# Altium PCB PCB1.PcbDoc (part 1 of 2)
Units mil, origin at the board's own origin, x right, y up, seen from the top; angles counter-clockwise.
Board outline 866.14 x 866.14 mil, 4 copper layers (Top Layer, Int1 (GND), Int2 (PWR), Bottom Layer), stack 53.912 mil thick; 31 components, 65 nets, 217 pads, 195 vias.
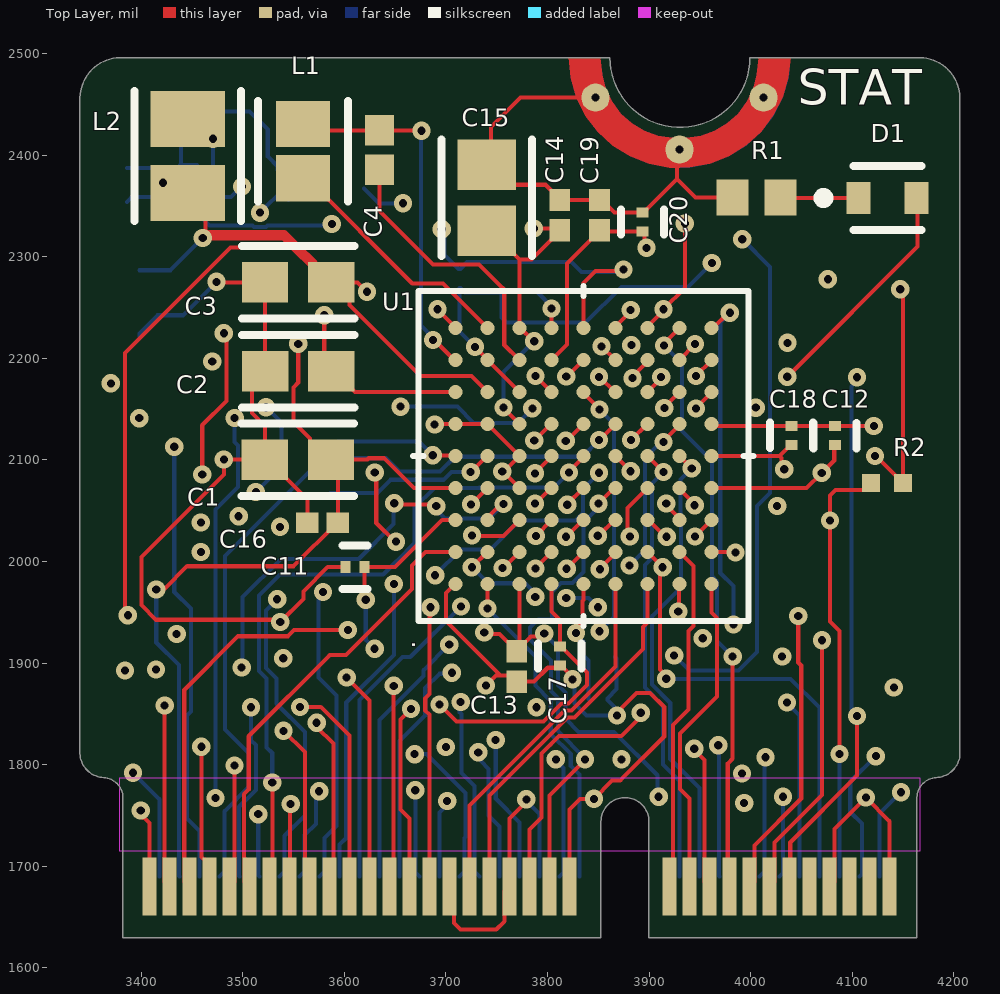
[diagram p0: Top Layer view]
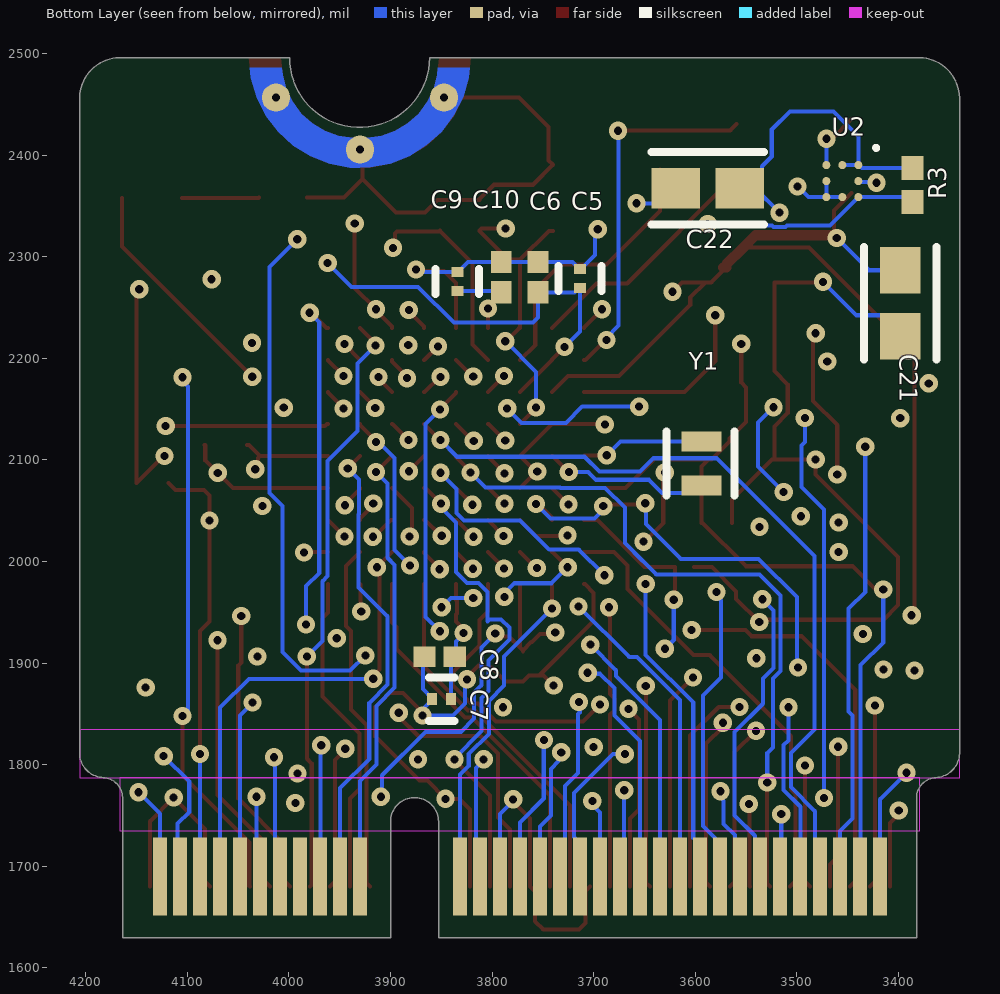
[diagram p1: Bottom Layer view, seen from below]
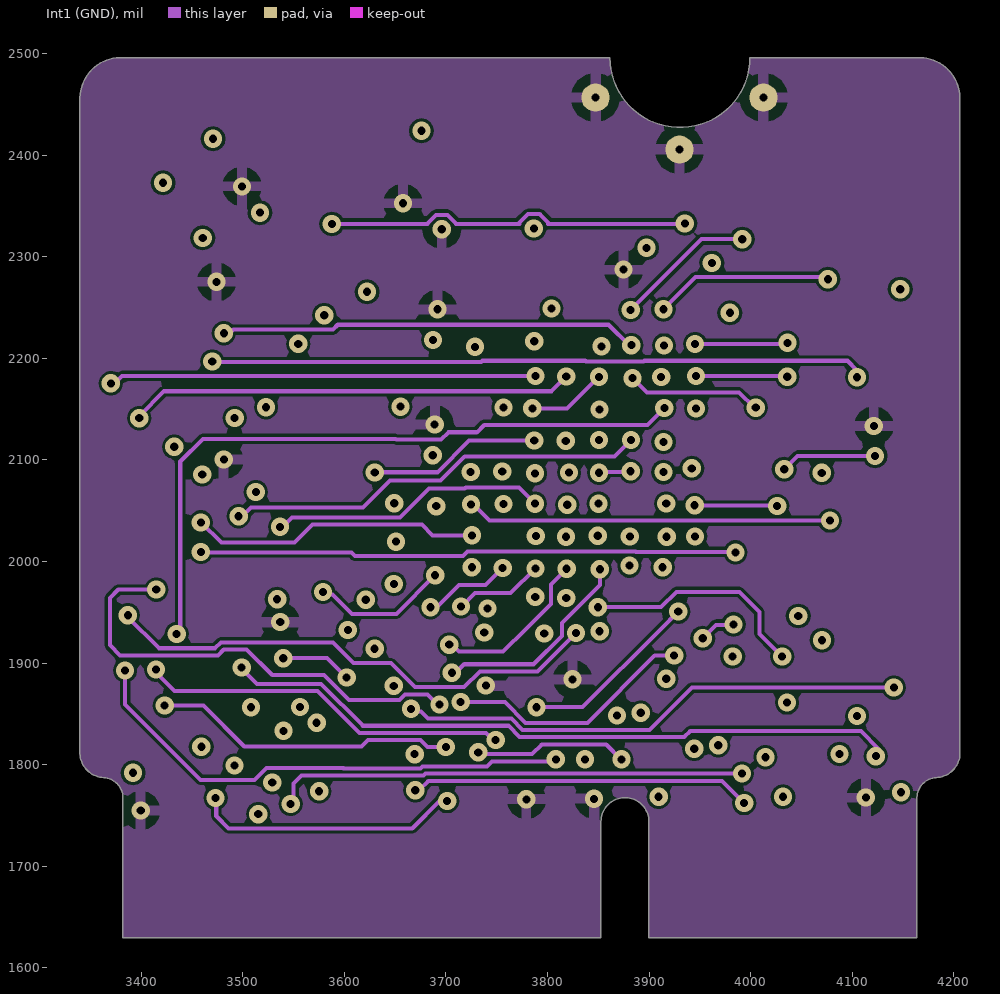
[diagram p2: Int1 (GND)]
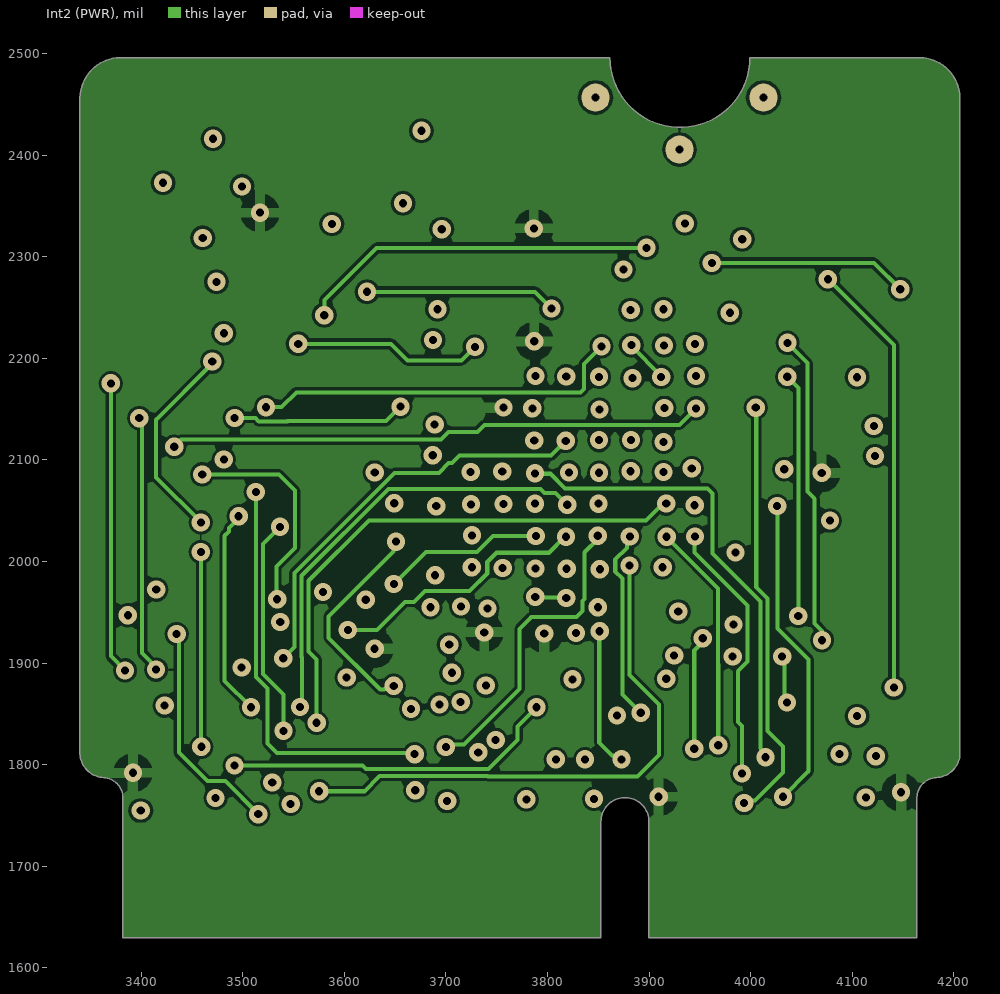
[diagram p3: Int2 (PWR)]
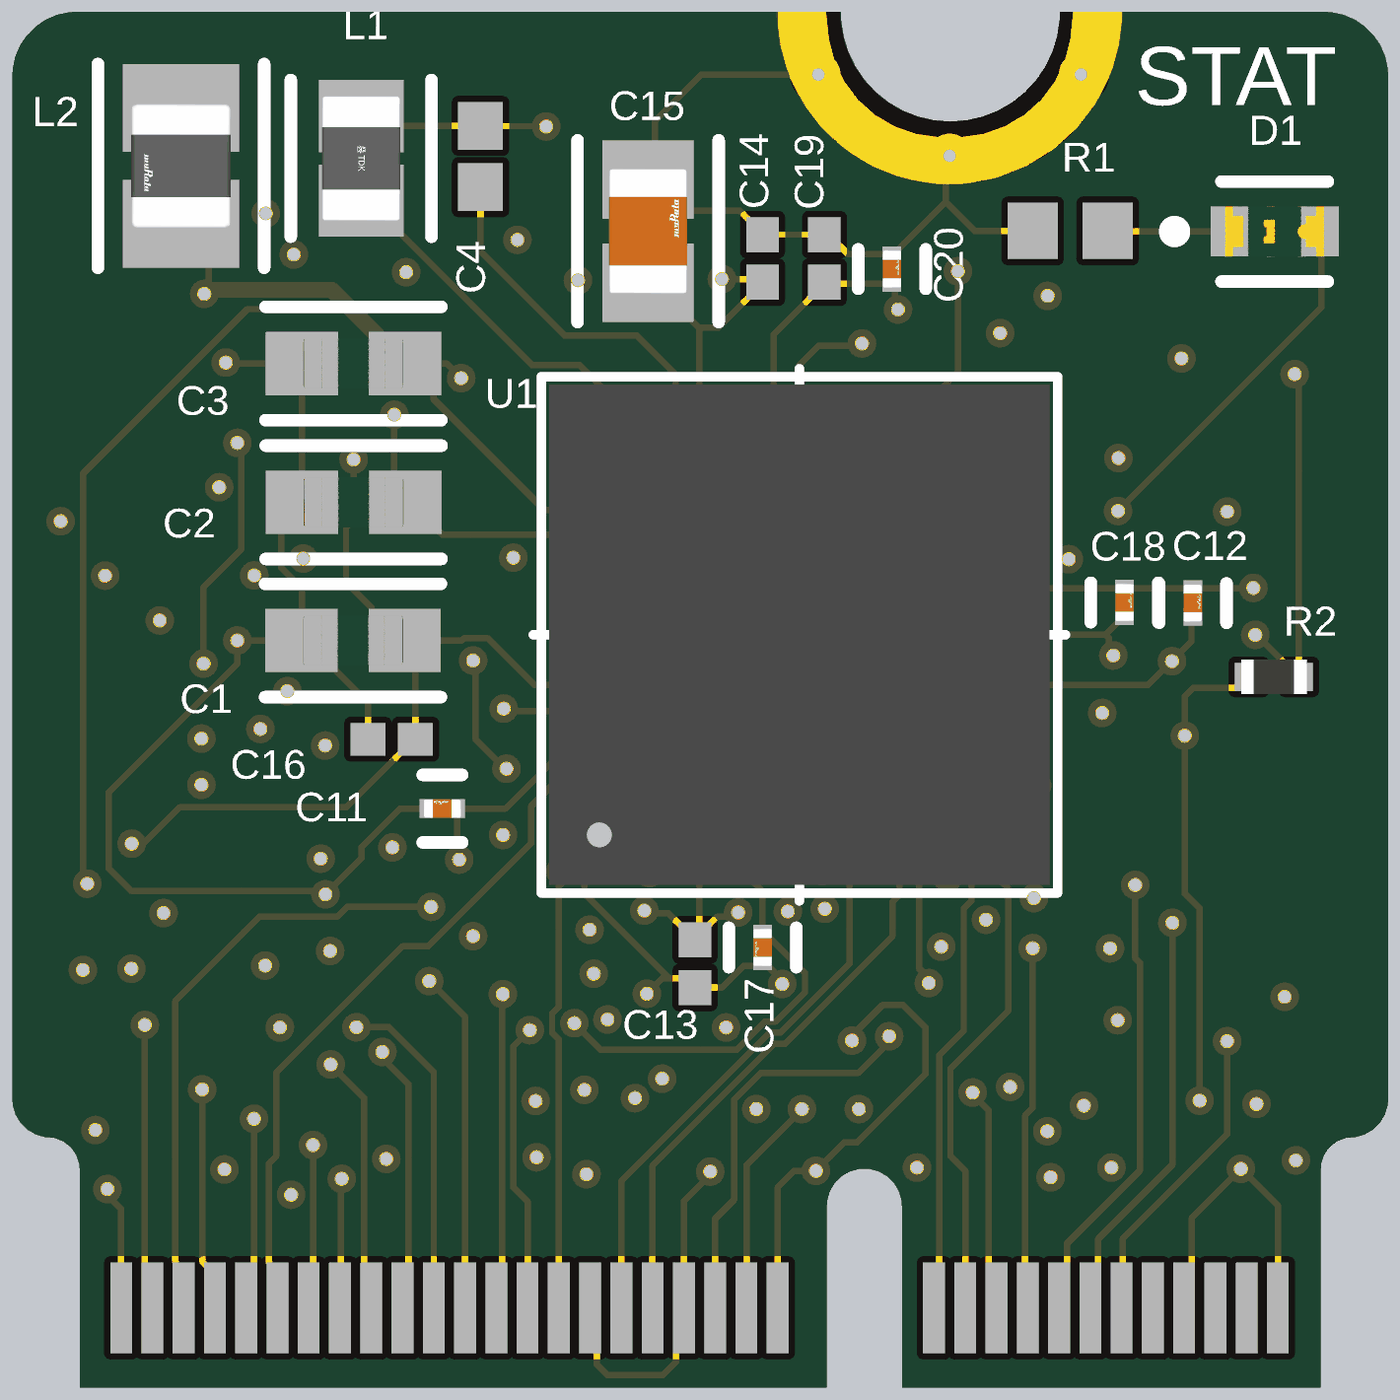
[diagram p5: 3D render of the assembled board from above, using the file's embedded part models]
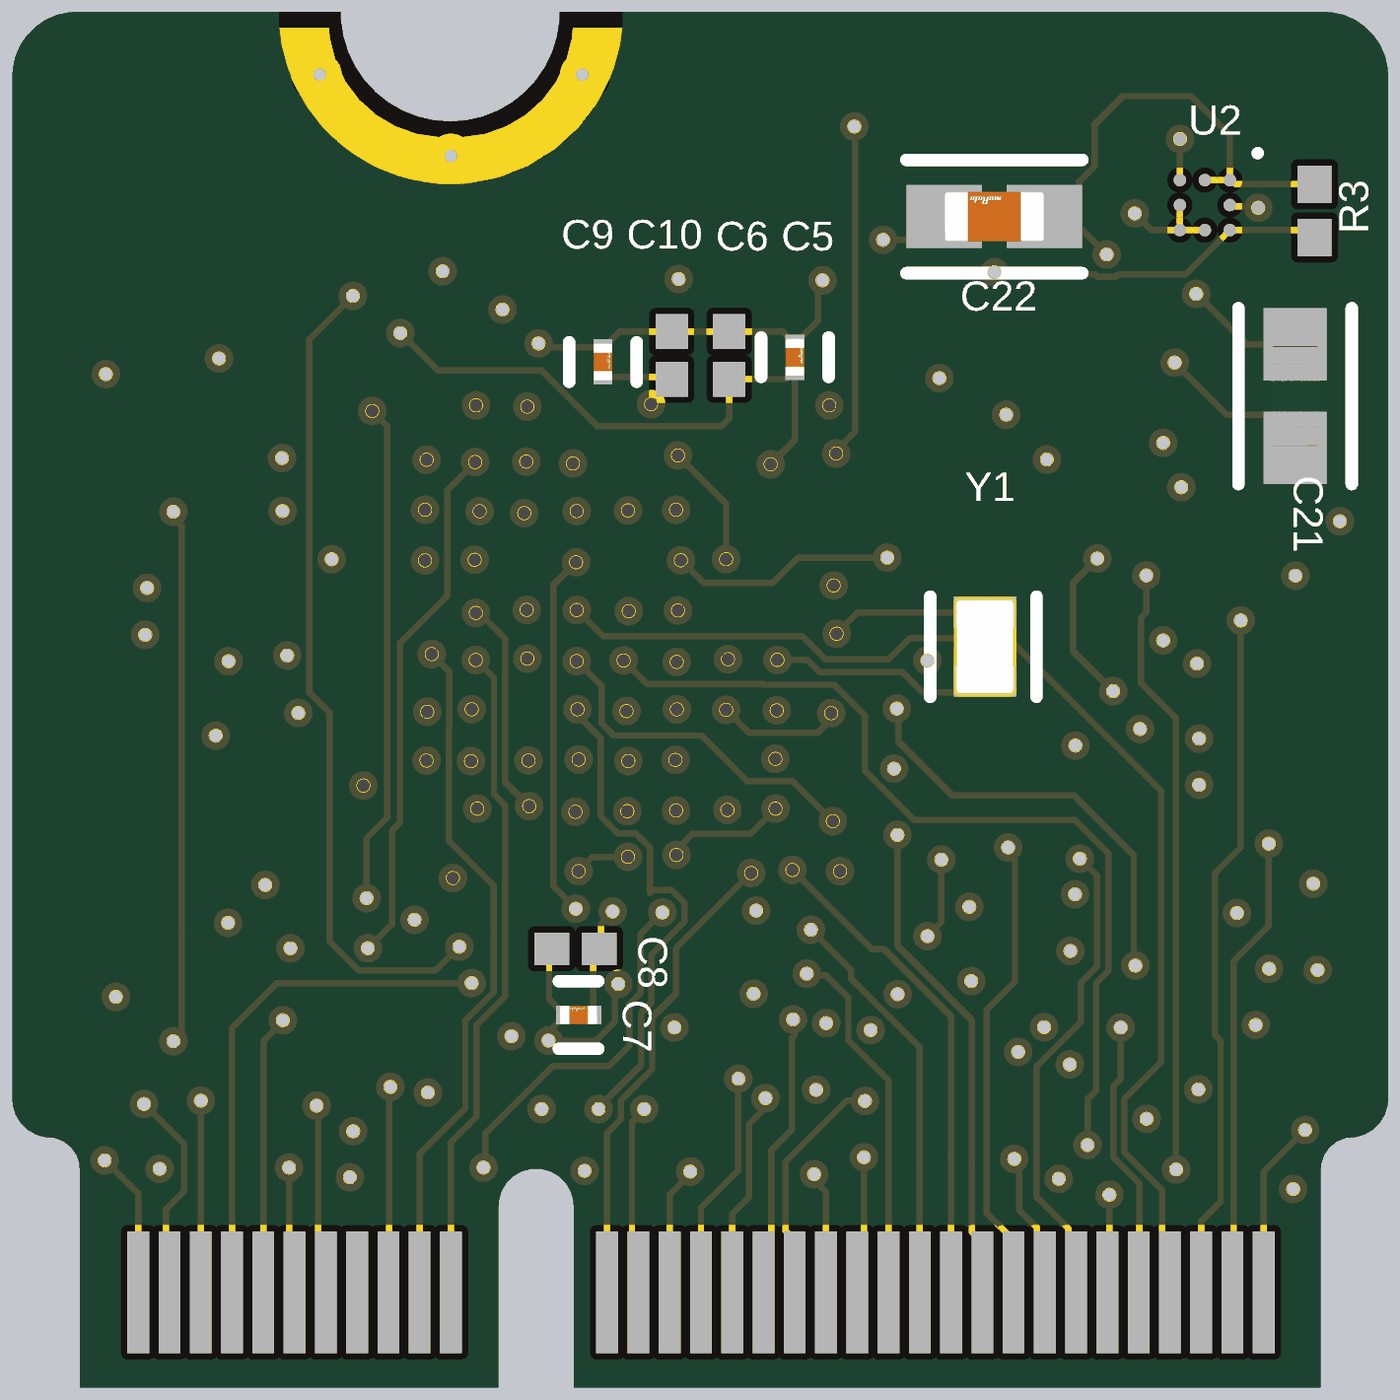
[diagram p6: 3D render of the assembled board from below, using the file's embedded part models]

## Layer stack, top to bottom
Top Solder: solder mask 1, SM-001, Dk 4
Top Layer: signal copper 1.378
Dielectric 1: prepreg 5.1, PP-017, Dk 4.3
Dielectric 2: prepreg 5.1, PP-017, Dk 4.3
Int1 (GND): signal copper 1.378
Dielectric 3: core 28, Core-039, Dk 4.8
Int2 (PWR): signal copper 1.378
Dielectric 4: prepreg 5.1, PP-017, Dk 4.3
Dielectric 5: prepreg 5.1, PP-017, Dk 4.3
Bottom Layer: signal copper 1.378
Bottom Solder: solder mask 1, SM-001, Dk 4

## Board outline
3382.23,1629.99 3852.71,1629.99 3852.71,1744.16 cw(c3876.33,1744.16) 3899.95,1744.16 3899.95,1629.99 4163.73,1629.99 4163.73,1767.79 cw(c4183.82,1767.42) 4182.43,1787.47 ccw(c4181.74,1811.77) 4206.05,1811.09 4206.05,2456.76 ccw(c4165.69,2455.78) 4166.68,2496.13 3999.36,2496.13 cw(c3930.46,2496.13) 3861.56,2496.13 3379.28,2496.13 ccw(c3380.26,2455.78) 3339.91,2456.76 3339.91,1811.09 ccw(c3364.21,1811.77) 3363.53,1787.47 cw(c3361.91,1767.21) 3382.23,1767.79

## Design rules (kind name [scope] priority, off if disabled: settings)
Clearance Clearance_BGA [WithinRoom('BGA')] p1: gap=4 ignorepadtopadclearanceinfootprint=FALSE
Clearance [All] p2: gap=3 ignorepadtopadclearanceinfootprint=FALSE
MinimumSolderMaskSliver [All] p1 off: minsoldermaskwidth=10
PolygonConnect [All] p1: connectstyle=Relief reliefconductorwidth=10 reliefentries=4 polygonreliefangle="90 Angle" airgapwidth=10
RoutingVias RoutingVias_BGA [WithinRoom('BGA')] p1: holewidth=8 width=18 viastyle="Through Hole" minholewidth=8 minwidth=18 maxholewidth=8 maxwidth=18
RoutingVias [All] p2: holewidth=8 width=18 viastyle="Through Hole" minholewidth=8 minwidth=18 maxholewidth=8 maxwidth=18
SilkToSilkClearance [All] p1 off: silktosilkclearance=10
SilkToSolderMaskClearance [IsPad] p1 off: minsilkscreentomaskgap=10 clearancetoexposedcopper=TRUE
SolderMaskExpansion [All] p1: expansion=4 istentingtop=FALSE
UnRoutedNet [All] p1: checkbadconnections=TRUE
Width Width_BGA [WithinRoom('BGA')] p1: maxlimit=4 minlimit=4 preferedwidth=4
Width [All] p2: maxlimit=10 minlimit=4 preferedwidth=4 midlayer1_maxwidth=4 midlayer2_maxwidth=4 bottomlayer_maxwidth=4 minimp=50.000000 maximp=50.000000 favimp=50.000000
26 further rules are at their usual default settings.

## Components (designator, comment, footprint, x,y, rotation, side; value= is the part's Value field where it differs from the comment)
C1 "C1608X5R0G226M080AA" FP-CL10-IPC_A 3554.33,2100.39 r180 top
C2 "C1608X5R0G226M080AA" FP-CL10-IPC_A 3554.72,2187.4 r180 top
C3 "C1608X5R0G226M080AA" FP-CL10-IPC_A 3554.61,2274.8 r180 top
C4 "GRM155R71H332KA01D" CAPC1005X55X25ML05T10 3634.65,2405.12 r90 top value="3300 pF"
C5 "GRM033R61C104KE14D" FP-GRM033-0_03-MFG 3713.39,2278.74 r90 bottom
C6 "C0402C105K8PAC7867" CAPC1005X60X30LL05T10 3754.72,2279.92 r270 bottom value=1uF
C7 "GRM033R61C104KE14D" FP-GRM033-0_03-MFG 3849.61,1864.57 r0 bottom
C8 "C0402C105K8PAC7867" CAPC1005X60X30LL05T10 3851.57,1906.3 r180 bottom value=1uF
C9 "GRM033R61C104KE14D" FP-GRM033-0_03-MFG 3834.25,2275.69 r90 bottom
C10 "C0402C105K8PAC7867" CAPC1005X60X30LL05T10 3790.94,2279.92 r270 bottom value=1uF
C11 "GRM033R61C104KE14D" FP-GRM033-0_03-MFG 3610.63,1994.49 r180 top
C12 "GRM033R61C104KE14D" FP-GRM033-0_03-MFG 4083.07,2123.92 r90 top
C13 "C0402C105K8PAC7867" CAPC1005X60X30LL05T10 3769.7,1896.82 r90 top value=1uF
C14 "C0402C105K8PAC7867" CAPC1005X60X30LL05T10 3812.2,2340.94 r270 top value=1uF
C15 "GRM21BR61A476ME15K" FP-GRM21B-0_2-e0_2_0_7-IPC_B 3740.16,2358.1 r90 top
C16 "C0402C105K8PAC7867" CAPC1005X60X30LL05T10 3578.74,2038.19 r0 top value=1uF
C17 "GRM033R61C104KE14D" FP-GRM033-0_03-MFG 3812.2,1907.09 r270 top
C18 "GRM033R61C104KE14D" FP-GRM033-0_03-MFG 4040.16,2124.31 r90 top
C19 "C0402C105K8PAC7867" CAPC1005X60X30LL05T10 3851.18,2340.94 r270 top value=1uF
C20 "GRM033R61C104KE14D" FP-GRM033-0_03-MFG 3893.7,2334.25 r90 top
C21 "C1608X5R0G226M080AA" FP-CL10-IPC_A 3398.43,2254.21 r270 bottom
C22 "GRM188R60J106ME47D" FP-GRM188-0_1-e0_2_0_55-IPC_A 3587.8,2367.32 r0 bottom
D1 "TLMO1000-GS08" FP-6_541-5056_01-4-MFG 4134.65,2357.87 r0 top
L1 "MLP2012H2R2MT0S1" FP-MLP2012M-IPC_C 3559.45,2403.94 r270 top
L2 "LQM2MPN2R2MG0L" FP-LQM2MPN_G0-IPC_A 3446.06,2399.21 r270 top
R1 "ERA3AEB301V" RESC1608X55X30LL20T20 4005.91,2358.27 r0 top
R2 "RMCF0402JT10K0" RESC1005X40X25LL05T05 4134.16,2077.42 r0 top
R3 "RC0402JR-070RL" RESC1005X40X25NL05T10 3386.22,2370.87 r270 bottom
U1 "MAX78000EXG+" 21-0735_MXM 3835.43,2103.94 r90 top
U2 "RP517Z121D-TR-F" WLCSP-8-P1 3460.24,2379.53 r0 bottom
Y1 "9HT12-32.768KDZY-T" FP-9HT12-MFG 3593.7,2096.46 r90 bottom

## Footprints (in the part's own frame and the unit in brackets; to place one, negate y for a bottom-side part, rotate by r counter-clockwise, add the part's x,y. Pads: shape width x height; smd on the part's side, far side on the other; paste and mask are expansions set on the pad)
21-0735_MXM [mil]
  round 14 smd paste+0 mask+0: A1(-125.98,125.98) A2(-94.49,125.98) A3(-62.99,125.98) A4(-31.5,125.98) A5(0,125.98) A6(31.5,125.98) A7(62.99,125.98) A8(94.49,125.98) A9(125.98,125.98) B1(-125.98,94.49) B2(-94.49,94.49) B3(-62.99,94.49) B4(-31.5,94.49) B5(0,94.49) B6(31.5,94.49) B7(62.99,94.49) B8(94.49,94.49) B9(125.98,94.49) C1(-125.98,62.99) C2(-94.49,62.99) C3(-62.99,62.99) C4(-31.5,62.99) C5(0,62.99) C6(31.5,62.99) C7(62.99,62.99) C8(94.49,62.99) C9(125.98,62.99) D1(-125.98,31.5) D2(-94.49,31.5) D3(-62.99,31.5) D4(-31.5,31.5) D5(0,31.5) D6(31.5,31.5) D7(62.99,31.5) D8(94.49,31.5) D9(125.98,31.5) E1(-125.98,0) E2(-94.49,0) E3(-62.99,0) E4(-31.5,0) E5(0,0) E6(31.5,0) E7(62.99,0) E8(94.49,0) E9(125.98,0) F1(-125.98,-31.5) F2(-94.49,-31.5) F3(-62.99,-31.5) F4(-31.5,-31.5) F5(0,-31.5) F6(31.5,-31.5) F7(62.99,-31.5) F8(94.49,-31.5) F9(125.98,-31.5) G1(-125.98,-62.99) G2(-94.49,-62.99) G3(-62.99,-62.99) G4(-31.5,-62.99) G5(0,-62.99) G6(31.5,-62.99) G7(62.99,-62.99) G8(94.49,-62.99) G9(125.98,-62.99) H1(-125.98,-94.49) H2(-94.49,-94.49) H3(-62.99,-94.49) H4(-31.5,-94.49) H5(0,-94.49) H6(31.5,-94.49) H7(62.99,-94.49) H8(94.49,-94.49) H9(125.98,-94.49) J1(-125.98,-125.98) J2(-94.49,-125.98) J3(-62.99,-125.98) J4(-31.5,-125.98) J5(0,-125.98) J6(31.5,-125.98) J7(62.99,-125.98) J8(94.49,-125.98) J9(125.98,-125.98)
  silkscreen extent -168,-168 168,168, body extent -157,-157 157,157, height 51
CAPC1005X55X25ML05T10 [mm] "Chip Capacitor, 2-Leads, Body 1.00x0.50mm, IPC Low Density"
  rect 0.76x0.72 smd: 1(-0.49,0) 2(0.49,0)
  body extent -0.53,-0.28 0.53,0.27, height 0.55
CAPC1005X60X30LL05T10 [mm] "Chip Capacitor, 2-Leads, Body 1.00x0.50mm, IPC High Density"
  rect 0.56x0.52 smd: 1(-0.38,0) 2(0.38,0)
  body extent -0.53,-0.28 0.53,0.28, height 0.6
FP-6_541-5056_01-4-MFG [mm]
  rect 0.6x0.8 smd paste+0 mask+0: 1(-0.725,0) 2(0.725,0)
  silkscreen extent -1.72,-0.8 0.85,0.8, body extent -1.12,-0.55 1.12,0.55, height 0.25
FP-9HT12-MFG [mm]
  rect 0.5x1 smd paste+0 mask+0: 1(-0.55,0) 2(0.55,0)
  silkscreen extent -0.8,-0.82 0.8,0.87, body extent -0.8,-0.5 0.8,0.5, height 0.5
FP-CL10-IPC_A [mil]
  rect 45.6x39.85 smd paste+0 mask+0: 1(-32.56,0) 2(32.56,0)
  silkscreen extent -55,-36 55,36, body extent -75,-40 75,40, height 10
FP-GRM21B-0_2-e0_2_0_7-IPC_B [mil]
  rect 49.4x57.33 smd paste+0 mask+0: 1(-32.51,0) 2(32.51,0)
  silkscreen extent -57,-44 57,44, body extent -67,-39 67,39, height 10
FP-GRM033-0_03-MFG [mm]
  rect 0.25x0.3 smd paste+0 mask+0: 1(-0.238,0) 2(0.238,0)
  silkscreen extent -0.32,-0.54 0.32,0.54, body extent -0.3,-0.15 0.3,0.15, height 0.33
FP-GRM188-0_1-e0_2_0_55-IPC_A [mil]
  rect 47.57x39.85 smd paste+0 mask+0: 1(-31.57,0) 2(31.57,0)
  silkscreen extent -55,-36 55,36, body extent -31,-16 31,16, height 36
FP-LQM2MPN_G0-IPC_A [mil]
  rect 55.36x73.16 smd paste+0 mask+0: 1(-36.46,0) 2(36.46,0)
  silkscreen extent -64,-52 64,52, body extent -84,-56 84,56, height 10
FP-MLP2012M-IPC_C [mil]
  rect 45.45x53.39 smd paste+0 mask+0: 1(-26.61,0) 2(26.61,0)
  silkscreen extent -49,-44 49,44, body extent -53,-32 53,32, height 10
RESC1005X40X25LL05T05 [mm] "Chip Resistor, 2-Leads, Body 1.05x0.55mm, IPC High Density"
  rect 0.45x0.45 smd: 1(-0.4,0) 2(0.4,0)
  body extent -0.53,-0.28 0.53,0.28, height 0.4
RESC1005X40X25NL05T10 [mm] "Chip Resistor, 2-Leads, Body 1.00x0.50mm, IPC Medium Density"
  rect 0.6x0.55 smd: 1(-0.425,0) 2(0.425,0)
  body extent -0.53,-0.27 0.53,0.28, height 0.4
RESC1608X55X30LL20T20 [mm] "Chip Resistor, 2-Leads, Body 1.60x0.80mm, IPC High Density"
  rect 0.8x0.9 smd: 1(-0.6,0) 2(0.6,0)
  body extent -0.9,-0.5 0.9,0.5, height 0.55
WLCSP-8-P1 [mm] "BGA, 9-Leads, Body 1.45x1.48mmx0.40mm, Pitch 0.40mm"
  round 0.2 smd: A1(-0.527,-0.273) A2(-0.527,0.127) A3(-0.527,0.527) B1(-0.127,-0.273) B3(-0.127,0.527) C1(0.273,-0.273) C2(0.273,0.127) C3(0.273,0.527)
  silkscreen extent -1.02,-0.75 -0.92,-0.65, body extent -0.87,-0.6 0.61,0.85, height 0.4

## Part data
C1 C2 C3 C21: library part CMP-13271-002755-1, "Cap Ceramic 22uF 16V X5R ±20% Pad SMD 0603 +85°C T/R", Capacitance=22uF, Case Code (Imperial)=0603, Case Code (Metric)=1608, Max Operating Temperature=85°C, Min Operating Temperature=-55°C, Tolerance=20%, Voltage Rating=16V, Case/Package=0603, Mount="Surface Mount", Packaging="Tape and Reel"
C4: library part CMP-2008-04658-1, Manufacturer=Murata, Part Number=GRM155R71H332KA01D
C5 C7 C9 C11 C12 C17 C18 C20: library part CMP-06035-039275-1, "Chip Multilayer Ceramic Capacitors for General Purpose, 0201, 0.10uF, X5R, 15%, 10%, 16V", Capacitance=100nF, Dielectric=X5R, Tolerance=10%, Voltage Rating (DC)=16V, Length=600um, Thickness=300um, Width=300um
C6 C8 C10 C13 C14 C16 C19: library part CMP-2008-02081-1, Manufacturer=Kemet, Part Number=C0402C105K8PAC7867
C15: library part CMP-06035-042633-1, "Chip Multilayer Ceramic Capacitors for General Purpose, 0805, 47uF, X5R, 15%, 20%, 10V", Capacitance=47uF, Case Code (Imperial)=0805, Case Code (Metric)=2012, Dielectric=X5R, Max Operating Temperature=85°C, Min Operating Temperature=-55°C, Package Quantity=10000, Tolerance=20%, Voltage Rating=10V, Case/Package=0805, Length=0.079inch, Mount="Surface Mount", Packaging="Tape and Reel", Termination=SMD/SMT, Thickness=0.057inch, Voltage Rating (DC)=10V, Weight=0.000335oz, Width=0.049inch
C22: library part CMP-2006-02792-2, "Chip Multilayer Ceramic Capacitors for General Purpose, 0603, 10uF, X5R, 15%, 20%, 6.3V", Capacitance=10uF, Case Code (Imperial)=0603, Case Code (Metric)=1608, Dielectric=X5R, Max Operating Temperature=85°C, Min Operating Temperature=-55°C, Package Quantity=4000, Tolerance=20%, Voltage=6.3V, Case/Package=0603, Depth=0.8mm, Height=0.8mm, Lead Free="Lead Free", Length=1.6mm, Material=Ceramic, Mount="Surface Mount", Packaging="Tape and Reel", Radiation Hardening=No, REACH SVHC="No SVHC", Termination=SMD/SMT, Thickness=0.035inch, Voltage Rating=6.3V, Voltage Rating (DC)=6.3V, Width=0.031inch
D1: library part CMP-02520-000010-1, "LED ORANGE 0603 SMD", Ambient Temperature Range High=+100°C, Ambient Temperature Range Low=-40°C, Colour=Orange, Forward Current=2mA, Forward Voltage=1.8V, Manufacturer=Vishay, Max Junction Temp=+120°C, Package=6.541-5056.01-4, Power Dissipation=40mW, Reverse Voltage=6V, Temperature="-40°C to +100°C", Automotive=Yes, Automotive Grade="Grade 2", Category=Diode, ComponentLink2Description=Datasheet, ComponentLink2URL=http://www.vishay.com/docs/83172/tlmo1000.pdf, Device Class L1=Optoelectronics, Device Class L2=LEDs, Device Class L3=unset, Digikey Description="LED ORANGE 0603 SMD", Height=0.65mm, Lead Free=Yes, Led Orientation="Top View", Luminous Intensity=7.5mcd, Manufacturer Part Number=TLMO1000-GS08, Octopart=https://octopart.com/tlmo1000-gs08-vishay-41955669, Peak Emmision Wavelength=610nm, RoHS=TRUE, Temperature Range High=+100°C, Temperature Range Low=-40°C, Viewing Angle=160°, Wavelength=605nm
L1: library part CMP-08253-000154-1, "Shielded Multilayer Inductor 2.2uH ±20% 1000mA 195mΩ SMD 0805", Case Code (Imperial)=0805, Case Code (Metric)=2012, Current Rating=1A, DC Resistance (DCR)=195mR, Inductance=2.2uH, Max Operating Temperature=125°C, Min Operating Temperature=-40°C, Package Quantity=4000, Test Frequency=2MHz, Tolerance=20%, Case/Package=0805, Core Material=Ferrite, Height - Seated (Max)=0.039inch, Lead Free="Lead Free", Length=0.079inch, Mount="Surface Mount", Packaging="Tape and Reel", RoHS Compliant=Yes, Shielding=Shielded, Width=0.049inch
L2: library part CMP-06042-008995-1, "Multilayer Type Inductor for Power Lines, 0806 (2016), 2.2μH, 20%, 0.138Ω, 1.2A", Case Code (Imperial)=0805, Case Code (Metric)=2012, Current Rating=1.2A, DC Resistance (DCR)=138mR, Inductance=2.2uH, Max Operating Temperature=125°C, Min Operating Temperature=-55°C, Package Quantity=3000, Self Resonant Frequency=40MHz, Test Frequency=1MHz, Tolerance=20%, Case/Package=0805, Core Material=Ferrite, Height=0.9mm, Height - Seated (Max)=0.039inch, Length=0.079inch, Max DC Current=1.2A, Mount="Surface Mount", Packaging="Tape and Reel", Shielding=Shielded, Termination=SMD/SMT, Weight=0.000353oz, Width=0.049inch
R1: library part CMP-2000-00025-1, Manufacturer=Panasonic, Part Number=ERA3AEB301V
R2: library part CMP-2000-07588-1, "Chip Resistor, 10 KOhm, +/- 1%, 0.1 W, -55 to 155 degC, 0402 (1005 Metric), RoHS, Tape and Reel", Case Code (Imperial)=0402, Case Code (Metric)=1005, Manufacturer=Panasonic, Max Operating Temperature=155degC, Max Power Dissipation=100mW, Min Operating Temperature=-55degC, Package Description="2-Pin Surface Mount Device, Body 1 x 0.5 mm", Package Quantity=1, Package Reference=402, Resistance=10KOhm, Temperature Coefficient=100ppm\/degreesC, Tolerance=1%, Voltage Rating=50V, Case\/Package=0402, Composition=ThickFilm, Contact Plating=Tin, Datasheet URL=https://industrial.panasonic.com/cdbs/www-data/pdf/RDA0000/AOA0000C304.pdf, Datasheet Version=02/2017, Depth=0.5mm, Height=0.35mm, Lead Free=LeadFree, Length=1mm, Manufacturer URL=http://www.panasonic.com/, Military Standard=Not, Mount=SurfaceMount, Mounting Technology=SurfaceMount, Number of Pins=2, Number of Terminations=2, Packaging=TapeandReel, Power Rating=100mW, Radiation Hardening=No, REACH SVHC=NoSVHC, RoHSCompliant=True, Termination=SMD/SMT, Voltage Rating (DC)=50V, Width=0.02inch
R3: library part CMP-1011-00001-2, Manufacturer="Yageo / Phycomp", Part Number=RC0402JR-070RL
U1: "No Description Available", Built_By=EMA_April, Copyright="Copyright (C) 2018 Accelerated Designs. All rights reserved", Manufacturer_Part_Number=MAX78000EXG+, RefDes=RefDes, SourceLibrary=Add_to_database_2021-03-26, Type=DEV, Vendor="Maxim Integrated Products"
U2: library part Component_1
Y1: library part CMP-18717-000010-1, "CRYSTAL 32.7680KHZ 7PF SMD", Case/Package=SMD/SMT, ESR (Equivalent Series Resistance)=90kR, Frequency=32.768kHz, Frequency Tolerance=20ppm, Load Capacitance=7pF, Max Operating Temperature=85°C, Min Operating Temperature=-40°C, Height=0.02inch, Lead Free="Lead Free", Length=0.063inch, Mount="Surface Mount", Packaging="Tape and Reel", Width=0.039inch

## Free pads (board coordinates)
  rect 13.78x57.09 smd paste+0: 1(4136.69,1680.16) 3(4117.01,1680.16) 5(4097.32,1680.16) 7(4077.64,1680.16) 9(4057.95,1680.16) 11(4038.27,1680.16) 13(4018.58,1680.16) 15(3998.9,1680.16) 17(3979.21,1680.16) 19(3959.53,1680.16) 21(3939.84,1680.16) 23(3920.16,1680.16) 33(3821.73,1680.16) 35(3802.05,1680.16) 37(3782.36,1680.16) 39(3762.68,1680.16) 41(3742.99,1680.16) 43(3723.31,1680.16) 45(3703.62,1680.16) 47(3683.94,1680.16) 49(3664.25,1680.16) 51(3644.57,1680.16) 53(3624.88,1680.16) 55(3605.2,1680.16) 57(3585.51,1680.16) 59(3565.83,1680.16) 61(3546.14,1680.16) 63(3526.46,1680.16) 65(3506.77,1680.16) 67(3487.09,1680.16) 69(3467.4,1680.16) 71(3447.72,1680.16) 73(3428.03,1680.16) 75(3408.35,1680.16)
  rect 13.78x76.77 smd far side paste+0: 2(4126.85,1690) 4(4107.17,1690) 6(4087.48,1690) 8(4067.8,1690) 10(4048.11,1690) 12(4028.43,1690) 14(4008.74,1690) 16(3989.06,1690) 18(3969.37,1690) 20(3949.69,1690) 22(3930,1690) 32(3831.58,1690) 34(3811.89,1690) 36(3792.21,1690) 38(3772.52,1690) 40(3752.83,1690) 42(3733.15,1690) 44(3713.46,1690) 46(3693.78,1690) 48(3674.09,1690) 50(3654.41,1690) 52(3634.72,1690) 54(3615.04,1690) 56(3595.35,1690) 58(3575.67,1690) 60(3555.98,1690) 62(3536.3,1690) 64(3516.61,1690) 66(3496.93,1690) 68(3477.24,1690) 70(3457.56,1690) 72(3437.87,1690) 74(3418.19,1690)
  round 27.87 hole 7.87: GND1(3847.32,2456.73) GND2(3930,2405.55) GND3(4012.68,2456.73)

## Via types
v1: diameter 18, hole 8, Top Layer to Bottom Layer, tented both sides, 195 vias

## Nets (pads, with @x,y where several pads share a name; then routed paths per layer and width w, separated by ;. In a path a pad name is that pad's centre, name@x,y a point inside that pad or via, vN(x,y) a via of type N, cw(c..) or ccw(c..) an arc to the next point about the centre after c; other vN are vias at no path point)
3V3: C11.1 C12.1 C13.2 C14.2 C15.1 C22.1 pad.2 pad.74 R3.1 U1.A3 U1.C1 U1.C6 U1.C9 U1.J4 U2.A1 U2.B1 | length 1555.7
  Top Layer w4: v1(3621.19,1962.43) 3619.98,1963.63 C11.1@3619.98,1994.49 3650.13,1994.49 3696.45,2040.81 3709.31,2040.81 U1.A3@3709.45,2040.94 ; v1(3737.8,1930.32) 3739.43,1928.68 3752.8,1928.68 3760.67,1920.8 3761.46,1920.8 C13.2@3769.7,1912.57 ; C15.1@3740.16,2325.59 3744.13,2325.59 3772.44,2297.27 ; v1(3756.69,2151.57) 3756.69,2151.38 3772.44,2135.63 U1.C6@3772.44,2135.43 ; C13.2@3769.7,1911.78 C13.2@3769.7,1912.57 ; U1.C1@3772.44,1977.95 C13.2@3772.44,1915.31 ; v1(3786.61,2327.95) 3810.24,2327.95 C14.2@3812.2,2325.98 3812.2,2325.2 3784.28,2297.27 3772.44,2297.27 ; v1(3787.01,2216.93) 3786.22,2216.93 3773.23,2229.92 U1.C9@3772.44,2229.92 3772.44,2297.27 ; v1(3796.85,1929.13) 3794.17,1926.46 3783.58,1926.46 C13.2@3772.44,1915.31 ; U1.J4@3961.42,2072.44 4055.12,2072.44 v1(4070,2087.33) 4082.28,2099.61 4082.28,2114.49 4082.36,2114.57 C12.1@4083.07,2114.57 ; C13.2@3769.7,1912.57 C13.2@3772.44,1915.31
  Bottom Layer w4: R3.1@3386.22,2387.6 3435.76,2387.6 3439.49,2391.32 3439.49,2418.62 3463.99,2443.12 3506.81,2443.12 3524.73,2425.2 3524.73,2398.82 3534.44,2389.11 3534.44,2385.25 C22.1@3552.36,2367.32 ; v1(3392.13,1792.13) 3418.19,1766.06 pad.74@3418.19,1690 ; U2.A1@3439.49,2390.28 U2.B1@3455.24,2390.28 ; v1(3517.05,2343.42) 3540.96,2367.32 C22.1@3552.36,2367.32 ; C22.1@3544.88,2355.98 C22.1@3556.23,2367.32 C22.1@3552.36,2367.32 ; v1(3621.19,1962.43) 3621.19,1922.91 v1(3629.92,1914.17) ; v1(3756.69,2151.57) 3756.69,2186.61 v1(3787.01,2216.93) ; v1(3796.85,1929.13) 3810.59,1915.39 3810.59,1878.31 3817.59,1871.31 3817.59,1845.4 3830.58,1832.41 3865.56,1832.41 3908.27,1789.7 3908.27,1769.68 v1(3909.45,1768.5) ; pad.2@4126.85,1690 4126.85,1751.83 v1(4148.04,1773.02)
AIN0: pad.34 U1.D7 | length 1348.5
  Top Layer w4: v1(3788.19,2182.68) U1.D7@3803.94,2166.93
  Int1 (GND) w4: v1(3370.25,2175.45) 3374.04,2175.45 3381.27,2182.68 v1(3788.19,2182.68) ; v1(3384.25,1892.91) 3384.25,1859.45 3458.49,1785.21 3511.87,1785.21 3523.34,1796.68 3599.1,1796.68 3599.33,1796.45 3675.09,1796.45 3676.89,1798.25 3738.5,1798.25 3738.59,1798.34 3740.41,1798.34 3745.52,1803.45 3806.39,1803.45 v1(3808.28,1805.34)
  Int2 (PWR) w4: v1(3370.25,2175.45) 3370.25,1906.91 v1(3384.25,1892.91)
  Bottom Layer w4: v1(3808.28,1805.34) 3808.28,1804.61 3815.97,1796.93 3815.97,1694.08 pad.34@3811.89,1690
AIN1: pad.38 U1.E8 | length 1225.4
  Top Layer w4: v1(3818.5,2182.28) 3819.29,2182.28 U1.E8@3835.43,2198.43
  Int1 (GND) w4: v1(3398.25,2141.22) 3398.25,2143.53 3422.4,2167.68 3803.9,2167.68 v1(3818.5,2182.28) ; v1(3414.79,1893.7) 3414.79,1890.72 3432.81,1872.7 3573.76,1872.7 3615.01,1831.45 3739.32,1831.45 3746.32,1824.45 v1(3748.98,1824.45)
  Int2 (PWR) w4: v1(3398.25,2141.22) 3400.93,2138.54 3400.93,2131.95 3401.01,2131.88 3401.01,1909.82 3414.79,1896.04 v1(3414.79,1893.7)
  Bottom Layer w4: v1(3748.98,1824.45) 3749.13,1824.3 3749.13,1766.78 3772.52,1743.38 pad.38@3772.52,1690
AIN2: pad.40 U1.E7 | length 675
  Top Layer w4: U1.E7@3835.43,2166.93 3835.43,2166.16 3851.18,2150.41 v1(3851.18,2149.65)
  Int1 (GND) w4: v1(3731.89,1812.25) 3733.69,1810.45 3784.79,1810.45 3794.42,1820.08 3857.87,1820.08 3872.61,1805.34 v1(3872.83,1805.34)
  Int2 (PWR) w4: v1(3851.38,1931.46) 3850.96,1931.04 3850.96,1821.94 3863.7,1809.2 3865.19,1809.2 3869.05,1805.34 v1(3872.83,1805.34)
  Bottom Layer w4: v1(3731.89,1812.25) 3734.57,1809.57 3734.57,1803.6 3742.13,1796.04 3742.13,1750 3752.83,1739.3 pad.40@3752.83,1690 ; v1(3851.18,2149.65) 3865.57,2135.25 3865.57,1945.66 v1(3851.38,1931.46)
AIN3: pad.42 U1.F9 | length 1108
  Top Layer w4: U1.F9@3866.93,2229.92 3866.93,2231.3 3881.89,2246.26 v1(3881.89,2247.64)
  Int1 (GND) w4: v1(3714.57,1861.77) 3758.03,1861.77 3778.47,1841.33 3839.36,1841.33 3905.59,1907.56 v1(3924.7,1907.56) ; v1(3881.89,2247.64) 3951.57,2317.32 v1(3991.73,2317.32)
  Bottom Layer w4: v1(3714.57,1861.77) 3712.8,1860 3713.7,1859.09 3713.7,1851.65 3715.35,1850 3715.35,1792.13 3728.26,1779.22 3728.26,1694.89 pad.42@3733.15,1690 ; v1(3924.7,1907.56) 3939.65,1892.64 3988.11,1892.64 4006.3,1910.83 4006.3,2054.75 4019.07,2067.52 4019.07,2289.98 v1(3991.73,2317.32)
AIN4: pad.44 U1.F8 | length 1041.2
  Top Layer w4: v1(3853.15,2211.85) 3853.33,2211.85 3866.75,2198.43 U1.F8@3866.93,2198.43
  Int2 (PWR) w4: v1(3512.99,2068.47) 3512.99,1886.56 3524.41,1875.14 3524.41,1820.87 3533.86,1811.42 3668.32,1811.42 v1(3669.29,1810.45) ; v1(3523.01,2151.97) 3538.19,2151.97 3552.8,2166.57 3832.32,2166.57 3835.79,2170.04 3835.79,2194.45 v1@3853.15,2211.81
  Bottom Layer w4: v1(3512.99,2068.47) 3538.19,2093.67 3538.19,2136.79 v1(3523.01,2151.97) ; v1(3669.29,1810.45) 3669.63,1810.78 3680.95,1810.78 3719.29,1772.44 3719.29,1728.73 3718.35,1727.79 3718.35,1694.89 pad.44@3713.46,1690
AIN5: pad.46 U1.F7 | length 1137.3
  Top Layer w4: v1(3850.79,2181.85) 3851.4,2181.85 3866.32,2166.93 U1.F7@3866.93,2166.93
  Int1 (GND) w4: v1(3473.35,1767.32) 3474.02,1766.66 3474.02,1749.61 3486.22,1737.4 3666.93,1737.4 3693.85,1764.32 v1(3701.31,1764.32) ; v1(3785.17,2150.86) 3819.36,2150.86 3850.35,2181.85 v1(3850.79,2181.85)
  Int2 (PWR) w4: v1(3492.13,2141.34) 3512.47,2141.34 3515.84,2137.97 3543.99,2137.97 3544.21,2138.19 3640.95,2138.19 v1(3655.28,2152.52)
  Bottom Layer w4: v1(3473.35,1767.32) 3473.35,2051.45 3495.5,2073.59 3495.5,2114.39 3492.13,2117.76 v1(3492.13,2141.34) ; v1(3655.28,2152.52) 3711.26,2152.52 3727.2,2136.57 3770.88,2136.57 v1(3785.17,2150.86) ; pad.46@3693.78,1690 3693.78,1753 3701.31,1760.53 v1(3701.31,1764.32)
AIN6: pad.48 U1.G8 | length 1001.4
  Top Layer w4: v1(3883.79,2180.57) 3883.79,2182.18 3898.43,2196.81 U1.G8@3898.43,2198.43
  Int1 (GND) w4: v1(3669.94,1774.98) 3673.42,1774.98 3682.69,1784.25 3971.72,1784.25 v1(3993.6,1762.37) ; v1(3883.79,2180.57) 3897.82,2166.54 3988.58,2166.54 4003.58,2151.54 v1(4005.07,2151.54)
  Int2 (PWR) w4: v1(3993.6,1762.37) 3996.14,1764.91 4004.28,1764.91 4031.89,1792.52 4031.89,1818.11 4016.57,1833.43 4016.57,1963.8 4005.49,1974.88 4005.49,2151.12 v1(4005.07,2151.54)
  Bottom Layer w4: v1(3669.94,1774.98) 3669.94,1694.15 pad.48@3674.09,1690
AIN7: pad.49 R3.2 U1.G9 U2.A3 | length 1989.1
  Top Layer w4: pad.49@3664.25,1680.16 3664.25,1747.17 3655.29,1756.13 3655.29,1844.66 v1(3665.7,1855.07) ; U1.G9@3898.43,2229.92 3898.43,2231.3 3914.17,2247.05 v1(3914.17,2248.43) 3935.21,2269.46 v1(3935.21,2332.84)
  Int1 (GND) w4: v1(3587.8,2332.28) 3681.99,2332.28 3681.99,2332.96 3690.19,2341.17 3701.79,2341.17 3709.99,2332.96 3709.99,2332.28 3772.61,2332.28 3772.61,2333.75 3780.82,2341.95 3792.41,2341.95 3800.61,2333.75 3800.61,2332.28 3934.65,2332.28 v1(3935.21,2332.84) ; v1(3665.7,1855.07) 3668.38,1852.39 3675.56,1852.39 3682.5,1845.45 3764.45,1845.45 3775.57,1834.33 3900.48,1834.33 3942.13,1875.98 v1(4140.94,1875.98) ; v1(3914.17,2248.43) 3945.67,2279.92 4074.02,2279.92 v1(4075.98,2277.95)
  Int2 (PWR) w4: v1(4075.98,2277.95) 4140.94,2212.99 v1(4140.94,1875.98)
  Bottom Layer w4: R3.2@3386.22,2354.13 3390.87,2358.78 U2.A3@3439.49,2358.78 3467.39,2330.88 3509.79,2330.88 3511.26,2329.42 3522.85,2329.42 3524.32,2330.88 3586.39,2330.88 v1(3587.8,2332.28)
GND: C1.2 C2.2 C3.2 C5.2 C6.1 C7.2 C8.1 C9.2 C10.1 C11.2 C12.2 C13.1 C14.1 C15.2 C16.1 C17.2 C18.2 C19.1 C20.2 C21.2 C22.2 pad.1 pad.7 pad.33 pad.36 pad.39 pad.45 pad.75 pad.GND1 pad.GND2 pad.GND3 R1.1 U1.A1 U1.A6 U1.A9 U1.B6 U1.C4 U1.C5 U1.E9 U1.J6 U2.B3 U2.C2 U2.C3 | length 3307.2
  Top Layer w4: v1(3399.68,1754.97) 3399.68,1751.18 3408.35,1742.51 pad.75@3408.35,1680.16 ; v1(3474.23,2275.37) 3474.8,2274.8 C3.2@3522.05,2274.8 3522.05,2187.4 3509.01,2174.36 3509.01,2146.17 3522.05,2133.13 3522.05,2100.67 C1.2@3521.77,2100.39 ; C16.1@3563.78,2038.19 3563.78,2061.26 3524.65,2100.39 C1.2@3521.77,2100.39 ; C11.2@3601.28,1994.49 3583.74,1994.49 3559.76,1970.51 3559.76,1963.31 v1(3537.01,1940.55) 3534.82,1942.74 3414.74,1942.74 3400.39,1957.09 3400.39,2004.72 3481.5,2085.83 v1(3481.5,2100.39) C1.2@3521.77,2100.39 ; v1(3688.98,2135.04) 3689.17,2135.24 3709.25,2135.24 U1.A6@3709.45,2135.43 U1.B6@3740.94,2135.43 U1.C5@3772.44,2103.94 3756.69,2088.19 U1.C4@3772.44,2072.44 ; v1(3691.73,2248.43) 3691.73,2248.03 3709.45,2230.31 U1.A9@3709.45,2229.92 ; pad.45@3703.62,1680.16 3707.87,1675.91 3707.87,1644.49 3714.57,1637.8 3749.61,1637.8 3757.79,1645.98 3757.79,1675.27 pad.39@3762.68,1680.16 3762.68,1747.33 3779.25,1763.9 v1(3779.25,1765.98) ; U1.A1@3709.45,1977.95 3708.75,1977.95 3699.96,1969.17 3699.96,1941.38 3753.56,1887.78 ; v1(3739.37,1877.95) 3749.19,1887.78 3753.56,1887.78 ; pad.33@3821.73,1680.16 3821.73,1755.95 3832.24,1766.46 v1(3845.82,1766.46) 3863.69,1784.34 3871.63,1784.34 3914.96,1827.67 3914.96,1856.69 3900.79,1870.87 3887.8,1870.87 3868.5,1851.57 v1(3868.5,1848.43) ; v1(3824.59,1884.1) 3824.59,1886.33 3813.19,1897.74 C17.2@3812.2,1897.74 3809.99,1895.52 3800.3,1895.52 3786.64,1881.86 C13.1@3769.7,1881.86 3763.78,1887.78 3753.56,1887.78 ; U1.E9@3835.43,2229.92 3835.43,2274.02 3847.3,2285.89 3873.29,2285.89 v1(3874.8,2287.4) ; pad.GND1@3847.32,2456.73 3773.66,2456.73 3744.49,2427.56 3744.49,2394.94 C15.2@3740.16,2390.61 3759.86,2370.92 3797.98,2370.92 3812.2,2356.69 C14.1@3812.2,2355.91 C19.1@3851.18,2355.91 3853.83,2355.91 3866.14,2343.6 C20.2@3893.7,2343.6 3894.53,2343.6 3927.54,2376.61 ; pad.GND2@3930,2405.55 3927.54,2403.09 3927.54,2376.61 ; U1.J6@3961.42,2135.43 3962.5,2135.43 3964.66,2133.27 C12.2@4083.07,2133.27 C12.2@4083.07,2133.27 4121.14,2133.35 v1(4121.26,2133.46) ; R1.1@3982.28,2358.27 3945.89,2358.27 3927.54,2376.61 ; pad.7@4077.64,1680.16 4082.53,1685.05 4082.53,1736.86 v1(4113.39,1767.72) 4136.69,1744.41 pad.1@4136.69,1680.16
  Bottom Layer w4: C21.2@3398.43,2221.65 3398.43,2224.53 3416.35,2242.45 3441.32,2242.45 v1(3474.23,2275.37) ; U2.B3@3455.24,2358.78 U2.C3@3470.98,2358.78 ; U2.C2@3470.98,2374.53 U2.C3@3470.98,2358.78 ; v1(3499.39,2369.29) 3499.2,2369.29 3488.68,2358.78 U2.C3@3470.98,2358.78 ; C22.2@3619.36,2367.32 3634.05,2352.64 v1(3657.85,2352.64) ; v1(3695.99,2327.17) 3698.86,2324.3 3698.86,2301.79 3712.56,2288.09 C5.2@3713.39,2288.09 3714.21,2288.09 3721,2294.88 C6.1@3754.72,2294.88 C10.1@3790.94,2294.88 3823.58,2294.88 3833.43,2285.04 C9.2@3834.25,2285.04 3872.44,2285.04 v1(3874.8,2287.4) ; v1(3779.25,1765.98) 3779.25,1764.53 3792.21,1751.57 pad.36@3792.21,1690 ; v1(3824.59,1884.1) 3824.59,1883.87 3826.77,1881.7 3826.77,1860.15 3838.5,1848.43 v1(3868.5,1848.43) 3865.83,1851.1 3865.83,1856.71 3858.96,1863.58 3858.96,1865.39 3868.11,1874.55 3868.11,1904.72 C8.1@3866.54,1906.3
  other v1: 3755.51,2088.58
I2C0_SCL: pad.53 U1.E6 | length 719.4
  Top Layer w4: v1(3602.33,1885.9) 3624.88,1863.35 pad.53@3624.88,1680.16 ; v1(3818.01,2118.85) 3818.85,2118.85 U1.E6@3835.43,2135.43
  Int1 (GND) w4: v1(3539.9,1904.86) 3540.16,1905.12 3583.11,1905.12 v1(3602.33,1885.9)
  Int2 (PWR) w4: v1(3539.9,1904.86) 3551.01,1915.97 3551.01,1988.97 3649.44,2087.4 3693.26,2087.4 3702.71,2096.85 3705.91,2096.85 3713.35,2104.29 3803.45,2104.29 v1(3818.01,2118.85)
I2C0_SDA: pad.51 U1.D6 | length 679.2
  Top Layer w4: v1(3629.98,2087.74) 3631.5,2086.22 3631.5,2038.19 3650.04,2019.65 v1(3650.97,2019.65) ; pad.51@3644.57,1680.16 3648.29,1683.88 3648.29,1877.26 v1(3648.7,1877.67) ; v1(3787.01,2119.29) 3787.4,2119.29 3803.54,2135.43 U1.D6@3803.94,2135.43
  Int1 (GND) w4: v1(3629.98,2087.74) 3630.16,2087.92 3665.75,2087.92 3691.61,2087.92 3722.98,2119.29 v1(3787.01,2119.29)
  Int2 (PWR) w4: v1(3648.7,1877.67) 3646.03,1874.99 3640.34,1874.99 3639.36,1874.02 3635.43,1874.02 3584.65,1924.8 3584.65,1946.14 3648.29,2009.78 3648.29,2016.97 v1(3650.97,2019.65)
I2C1_SCL: pad.14 U1.D5 | length 607.7
  Top Layer w4: v1(3787.8,2086.87) 3787.8,2087.33 3803.94,2103.48 U1.D5@3803.94,2103.94
  Int2 (PWR) w4: v1(3787.8,2086.87) 3788.21,2086.46 3802.8,2086.46 3817.25,2072.01 3899.44,2072.01 3899.52,2072.09 3957.44,2072.09 3962.6,2066.93 3962.6,2007.87 4005.12,1965.35 4009.57,1960.9 4009.57,1816.26 4014.57,1811.27 v1(4014.57,1807.48)
  Bottom Layer w4: pad.14@4008.74,1690 4013.63,1694.89 4013.63,1806.54 v1(4014.57,1807.48)
I2C1_SDA: pad.12 U1.H4 | length 494.1
  Top Layer w4: U1.H4@3929.92,2072.44 3929.92,2071.46 3944.89,2056.49 v1(3944.89,2055.51)
  Int1 (GND) w4: v1(3944.89,2055.51) 3945.28,2055.12 4025.68,2055.12 v1(4026.07,2054.72)
  Int2 (PWR) w4: v1(4026.07,2054.72) 4026.38,2054.42 4026.38,1934.33 4057.09,1903.62 4057.09,1793.67 v1(4031.89,1768.5)
  Bottom Layer w4: pad.12@4028.43,1690 4031.89,1693.46 v1(4031.89,1768.5)
I2C2_SCL: pad.67 U1.H1 | length 658.8
  Top Layer w4: pad.67@3487.09,1680.16 3491.98,1685.05 v1(3491.99,1799.21) ; v1(3928.74,1950.79) 3929.33,1951.38 3929.33,1977.36 U1.H1@3929.92,1977.95
  Int1 (GND) w4: v1(3789.24,1856.69) 3834.65,1856.69 3911.81,1933.86 v1(3928.74,1950.79)
  Int2 (PWR) w4: v1(3491.99,1799.21) 3617.98,1799.21 3621.21,1795.98 3741.99,1795.98 3770.56,1824.55 3770.56,1837.49 3789.24,1856.17 v1(3789.24,1856.69)
I2C2_SDA: pad.8 U1.G2 | length 463.6
  Top Layer w4: U1.G2@3898.43,2009.45 v1(3913.39,1994.49) 3910.71,1991.81 3910.71,1985.15 3910.7,1893.99 3916.93,1887.76 v1(3916.93,1884.65)
  Bottom Layer w4: v1(3916.93,1884.65) 4039.37,1884.65 4067.8,1856.22 pad.8@4067.8,1690
I2S_CLKEXT: pad.58 U1.F5 | length 701.2
  Top Layer w4: U1.F5@3866.93,2103.94 v1(3881.89,2088.98)
  Int1 (GND) w4: v1(3579.13,1970.08) 3581.81,1967.4 3588.6,1967.4 3607.57,1948.43 3651.29,1948.43 v1(3689.47,1986.61) ; v1(3850.79,2087.4) 3851.57,2088.19 3881.1,2088.19 v1(3881.89,2088.98)
  Bottom Layer w4: pad.58@3575.67,1690 3580.56,1694.89 3580.56,1727.8 3592.52,1739.76 3592.52,1868.11 3574.8,1885.83 3574.8,1961.96 3579.13,1966.29 v1(3579.13,1970.08) ; v1(3689.47,1986.61) 3714.71,2011.85 3743.74,2011.85 3772.44,2040.55 3827.68,2040.55 3835.04,2047.91 3835.04,2071.65 v1(3850.79,2087.4)
I2S_SCK: pad.50 U1.F2 | length 456.4
  Top Layer w4: v1(3851.57,1992.52) 3851.57,1993.31 3866.93,2008.66 U1.F2@3866.93,2009.45
  Int1 (GND) w4: v1(3705.91,1890.55) 3709.69,1890.55 3718.1,1898.95 3786.47,1898.95 3814.13,1926.61 3814.13,1939.44 3851.57,1976.89 v1(3851.57,1992.52)
  Bottom Layer w4: pad.50@3654.41,1690 3654.41,1823.31 3679.7,1848.6 3679.7,1875.66 3693.64,1889.6 3704.95,1889.6 v1(3705.91,1890.55)
I2S_SDI: pad.54 U1.D2 | length 423.6
  Top Layer w4: v1(3788.19,1993.31) 3788.19,1993.5 3803.94,2009.25 U1.D2@3803.94,2009.45
  Int1 (GND) w4: v1(3714.96,1955.91) 3715.35,1955.51 3728.78,1968.94 3763.82,1968.94 v1(3788.19,1993.31)
  Bottom Layer w4: pad.54@3615.04,1690 3615.04,1863.81 3657.14,1905.91 3664.96,1905.91 v1(3714.96,1955.91)
I2S_SDO: pad.56 U1.D3 | length 491.5
  Top Layer w4: v1(3788.58,2025.2) 3788.58,2025.39 3803.94,2040.75 U1.D3@3803.94,2040.94
  Int2 (PWR) w4: v1(3648.82,1977.95) 3665.75,1994.88 3680.35,2009.49 3730.54,2009.49 3746.25,2025.2 v1(3788.58,2025.2)
  Bottom Layer w4: pad.56@3595.35,1690 3595.35,1721.49 3601.97,1728.11 3601.97,1861.3 3648.82,1908.15 v1(3648.82,1977.95)
I2S_WS: pad.52 U1.E2 | length 443.4
  Top Layer w4: v1(3818.9,1992.91) U1.E2@3835.43,2009.45
  Int1 (GND) w4: v1(3703.29,1918.25) 3706.05,1918.25 3712.89,1911.42 3756.45,1911.42 3778.89,1933.86 3803.5,1958.47 3803.5,1977.52 v1(3818.9,1992.91)
  Bottom Layer w4: pad.52@3634.72,1690 3634.72,1843.89 3678.08,1887.25 3678.08,1893.04 v1(3703.29,1918.25)
NetC4_1: C4.1 U1.C8 | length 271
  Top Layer w4: C4.1@3634.65,2385.83 3634.65,2345.28 3687.4,2292.52 3732.68,2292.52 3752.36,2272.83 3757.48,2267.72 3757.48,2213.39 U1.C8@3772.44,2198.43
NetC4_2: C4.2 L1.1 U1.A8 | length 360.5
  Top Layer w4: L1.1@3559.45,2430.55 3565.59,2424.41 C4.2@3634.65,2424.41 3634.84,2424.21 3675.79,2424.21 v1(3675.98,2424.02) ; v1(3687.4,2218.11) 3688.58,2218.11 3708.27,2198.43 U1.A8@3709.45,2198.43
  Bottom Layer w4: v1(3675.98,2424.02) 3675.49,2423.52 3675.49,2272.83 3675.49,2232.18 3687.4,2220.28 v1(3687.4,2218.11)
NetD1_1: D1.1 R1.2 | length 75.8
  Top Layer w4: R1.2@4029.53,2358.27 4029.92,2357.87 D1.1@4105.12,2357.87
NetL1_2: L1.2 U1.B9 | length 242.6
  Top Layer w4: L1.2@3559.45,2377.33 3563.42,2377.33 3666.94,2273.81 3697.06,2273.81 3698.03,2272.83 U1.B9@3740.94,2229.92
NetL2_1: L2.1 U2.C1 | length 58.8
  Top Layer w4: L2.1@3446.06,2435.67 3465.59,2416.14 v1(3470.87,2416.14)
  Bottom Layer w4: v1(3470.87,2416.14) v1(3470.87,2416.14) 3470.93,2390.33 U2.C1@3470.98,2390.28
NetU1_A5: U1.A5 Y1.2 | length 121.6
  Top Layer w4: v1(3687.11,2104.63) 3687.45,2104.28 3709.1,2104.28 U1.A5@3709.45,2103.94
  Bottom Layer w4: Y1.2@3593.7,2118.11 3673.62,2118.11 v1(3687.11,2104.63)
NetU1_B5: U1.B5 Y1.1 | length 169.3
  Top Layer w4: v1(3724.41,2088.19) 3724.8,2088.19 3740.55,2103.94 U1.B5@3740.94,2103.94
  Bottom Layer w4: Y1.1@3586.61,2067.72 3632.8,2067.72 3645.62,2080.54 3697.72,2080.54 3705.36,2088.19 v1(3724.41,2088.19)